# EAGLE board RatDBS-Compact2032Battery (EAGLE 7.3.0)
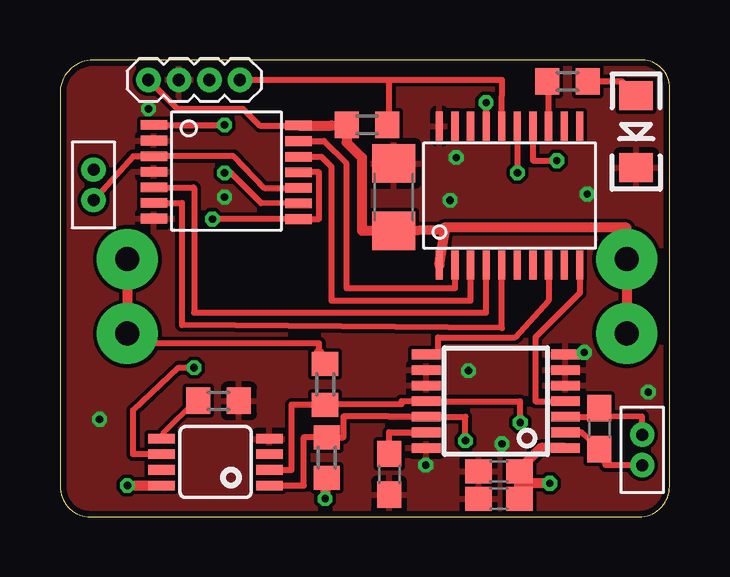
[diagram p0: board, top side]
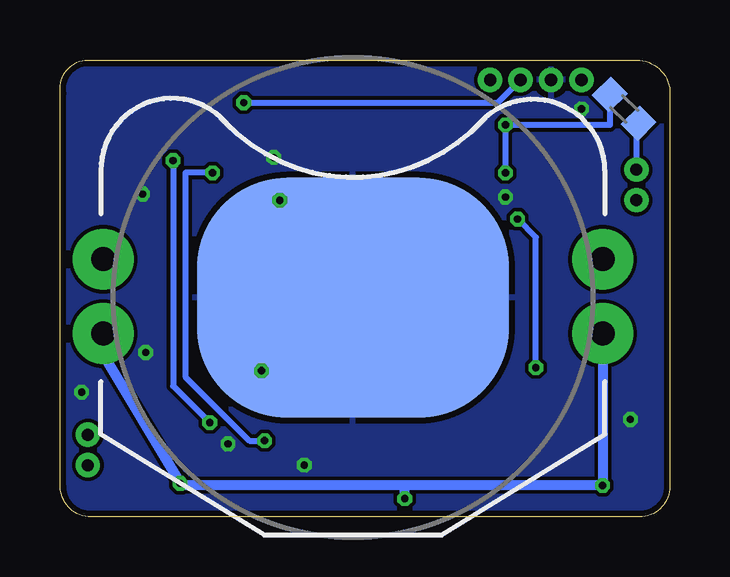
[diagram p1: board, bottom side, seen from below]

Size 25.41 x 19.06 mm. Coordinates in mm from the lower left corner, seen from the top.
Outline: 0,17.78 0,1.27 arc90 1.27,0 24.13,0 arc90 25.4,1.27 25.4,17.65 arc90 24.38,19.05 1.52,19.05 arc90 0,17.78
Copper layers (1*16): Top 0.035mm / dielectric 1.5mm / Bottom 0.035mm
Design rules "Seeed_DRU": minimum track width 6mil, minimum drill 12mil, track to track 6mil, track to pad 6mil, pad to pad 6mil, via to via 6mil, smd to smd 0mil, copper to edge 10mil, drill to drill 10mil, minimum pad ring 10mil, minimum via ring 6mil, stop-mask expansion 2mil, vias tented up to drill 100mil, thermal gap 10mil

## Footprints (pad centres in the part's own frame; a part is rotated, then mirrored left to right if it is on the bottom)
FTSH-102-DH = drill 0.5 pad 1: P$1 -0.635,0; P$2 0.635,0
BATTCON_20MM_PTH_COMPACT = drill 1 pad 2.54: 1 -10.4,1.6; 3 10.4,1.6; 4 10.4,-1.5; 5 -10.4,-1.5 | smd 13 x 10: 2 0,0
C0603 = smd 1.1 x 1: 1 -0.85,0; 2 0.85,0
C1206 = smd 1.6 x 1.8: 1 -1.4,0; 2 1.4,0
8_PIN = smd 1.1 x 0.4: 1 -2.25,0.975; 2 -2.25,0.325; 3 -2.25,-0.325; 4 -2.25,-0.975; 5 2.25,-0.975; 6 2.25,-0.325; 7 2.25,0.325; 8 2.25,0.975
1X04-1.27MM = drill 0.508 pad 1: 1 0,0; 2 1.27,0; 3 2.54,0; 4 3.81,0
LED-1206 = smd 1.2 x 1.4: A -1.5,0; C 1.5,0
20_PIN = smd 0.3 x 1.2: 1 -2.925,-2.9; 2 -2.275,-2.9; 3 -1.625,-2.9; 4 -0.975,-2.9; 5 -0.325,-2.9; 6 0.325,-2.9; 7 0.975,-2.9; 8 1.625,-2.9; 9 2.275,-2.9; 10 2.925,-2.9; 11 2.925,2.9; 12 2.275,2.9; 13 1.625,2.9; 14 0.975,2.9; 15 0.325,2.9; 16 -0.325,2.9; 17 -0.975,2.9; 18 -1.625,2.9; 19 -2.275,2.9; 20 -2.925,2.9
R0603 = smd 1 x 1.1: 1 -0.85,0; 2 0.85,0
14_PIN = smd 1.1 x 0.4: 1 -3.26,1.165; 2 -3.26,0.515; 3 -3.26,-0.135; 4 -3.26,-0.785; 5 -3.26,-1.435; 6 -3.26,-2.085; 7 -3.26,-2.735; 8 2.77,-2.755; 9 2.77,-2.105; 10 2.77,-1.455; 11 2.77,-0.805; 12 2.77,-0.155; 13 2.77,0.495; 14 2.77,1.145
PW_R-PDSO-G14 = smd 0.4 x 1.2: 1 -1.95,-2.9; 2 -1.3,-2.9; 3 -0.65,-2.9; 4 0,-2.9; 5 0.65,-2.9; 6 1.3,-2.9; 7 1.95,-2.9; 8 1.95,2.9; 9 1.3,2.9; 10 0.65,2.9; 11 0,2.9; 12 -0.65,2.9; 13 -1.3,2.9; 14 -1.95,2.9

## Placement (x,y rotation side)
ANT  FTSH-102  [FTSH-102-DH]  24.26,2.79 270 top
BAT1  20mm coincell  [BATTCON_20MM_PTH_COMPACT]  13.21,9.14 0 bottom
C1  1µ  [C0603]  18.29,1.91 180 top
C2  0.1µ  [C0603]  18.29,0.76 180 top
C_VC  0.47µ  [C0603]  13.72,1.78 270 top
CANT  [C0603]  22.48,3.68 270 top
CBAT  10µ  [C1206]  13.91,13.34 270 top
DS4432U+  [8_PIN]  6.48,2.29 180 top
JP1  [1X04-1.27MM]  3.68,18.22 0 top
LED6  GREEN  [LED-1206]  24,16.07 270 top
MSP430  MSP  [20_PIN]  18.73,13.4 0 top
R1_I2C  10k  [R0603]  11.11,2.48 270 top
R2_I2C  10k  [R0603]  11.05,5.52 90 top
R_INPUT_FS0  47k  [R0603]  6.6,4.84 180 top
R_LED  R_LED  [R0603]  21.15,18.16 0 top
R_LOAD_EX  10k  [R0603]  1.91,17.02 135 bottom
R_PULLUP_RST  43k  [R0603]  12.79,16.35 180 top
STIM  FTSH-102  [FTSH-102-DH]  1.4,13.84 90 top
TS3A4751_0  SW  [14_PIN]  7.18,15.18 0 top
U$1  RF  [PW_R-PDSO-G14]  18.16,4.83 90 top

## Library data of the parts
ANT STIM = Samtec50Mil
BAT1 = Battery
C1 C2 C_VC CANT CBAT = rcl
DS4432U+ MSP430 = RatDBS
JP1 = SparkFun
LED6 = SparkFun-LED
R1_I2C R2_I2C R_INPUT_FS0 R_LED R_LOAD_EX R_PULLUP_RST TS3A4751_0 = BiphasicBoard
U$1 = RF430CL330H

## Nets
_RST: JP1.4 MSP430.16 R_PULLUP_RST.1
GND: BAT1.2 C1.2 C2.2 C_VC.2 CBAT.1 DS4432U+.4 JP1.2 LED6.C MSP430.20 R_INPUT_FS0.1 TS3A4751_0.2 TS3A4751_0.4 TS3A4751_0.7 U$1.5 U$1.6 U$1.7 U$1.9 U$1.10 U$1.14
IN1: MSP430.2 TS3A4751_0.13
IN2: MSP430.4 TS3A4751_0.5
IN3: MSP430.5 TS3A4751_0.6
IN4: MSP430.3 TS3A4751_0.12
N$1: C_VC.1 U$1.13
N$2: ANT.P$2 CANT.2 U$1.2
N$3: MSP430.8 U$1.8
N$4: R_LOAD_EX.1 STIM.P$2
N$5: MSP430.13 R_LED.1
N$6: MSP430.7
N$7: MSP430.10 U$1.4
N$8: DS4432U+.5 R_INPUT_FS0.2
N$9: LED6.A R_LED.2
N$12: ANT.P$1 CANT.1 U$1.3
SCL: DS4432U+.2 MSP430.14 R2_I2C.1 U$1.11
SDA: DS4432U+.1 MSP430.15 R1_I2C.1 U$1.12
STIM_IN: DS4432U+.6 TS3A4751_0.8 TS3A4751_0.11
STIM_OUT1: R_LOAD_EX.2 TS3A4751_0.1 TS3A4751_0.9
STIM_OUT2: STIM.P$1 TS3A4751_0.3 TS3A4751_0.10
TEST: JP1.3 MSP430.17
VDD: BAT1.1 BAT1.3 BAT1.4 BAT1.5 C1.1 C2.1 CBAT.2 DS4432U+.8 JP1.1 MSP430.1 R1_I2C.2 R2_I2C.2 R_PULLUP_RST.2 TS3A4751_0.14 U$1.1

## Tracks (layer width: path | path; a pad name or v marks a point on that pad's centre or on a via)
_RST
  Top 0.254: MSP430.16 18.41,17.57 18.41,18.22 13.72,18.22 | 13.46,16.57 R_PULLUP_RST.1 13.72,16.42 13.72,18.22 | JP1.4 13.72,18.22
GND  (via drill 0.3)
  other vias: 16.51,14.99 21.97,13.46 21.84,6.86 3.68,17.02 17.02,6.1 18.41,3.05 15.24,2.16 1.65,4.06 24.51,5.21 16.26,13.21 6.86,13.34
  pour Bottom: 0,19.05 25.4,19.05 25.4,0 0,0
  pour Top: 0,19.05 25.4,19.05 25.4,0 0,0
IN1
  Top 0.254: MSP430.2 16.46,9.53 11.94,9.53 11.94,14.73 11,15.67 TS3A4751_0.13
IN2
  Top 0.254: TS3A4751_0.5 5.56,13.74 5.59,13.72 5.59,8.51 17.76,8.51 MSP430.4
IN3
  Top 0.254: TS3A4751_0.6 5.08,13.09 5.08,8 18.41,7.87 MSP430.5
IN4
  Top 0.254: TS3A4751_0.12 10.89,15.02 11.3,14.61 11.3,9.02 17.11,9.02 MSP430.3
N$1
  Top 0.254: C_VC.1 13.72,3.53 U$1.13
N$2
  Top 0.254: U$1.2 21.72,3.53 CANT.2 22.73,2.16 ANT.P$2
N$3
  Top 0.254: MSP430.8 20.36,9.02 18.96,7.49 15.75,7.49 15.75,6.78 U$1.8
N$4
  Bottom 0.254: R_LOAD_EX.1 1.4,16.42 STIM.P$2
N$5
  Top 0.254: MSP430.13 20.36,17.84 R_LED.1
N$7
  Top 0.254: U$1.4 19.81,4.83 19.81,7.49 21.66,9.34 MSP430.10
N$8
  Top 0.203: DS4432U+.5 4.27,3.45 5.69,4.88 R_INPUT_FS0.2
N$9
  Top 0.254: R_LED.2 23.41,18.16 LED6.A
N$12
  Top 0.254: U$1.3 22.73,4.18 | ANT.P$1 24.26,4.19 22.73,4.18 | 22.73,4.18 CANT.1
SCL  (via drill 0.3)
  Top 0.254: DS4432U+.2 9.65,1.96 9.65,4.67 R2_I2C.1 11.56,4.7 14.22,4.7 14.22,4.83 U$1.11 19.18,4.83 v19.18,3.94 | MSP430.14 19.71,14.86 v20.7,14.86
  Bottom 0.254: v20.7,14.86 20.7,5.46 v19.18,3.94
SDA  (via drill 0.3)
  Top 0.254: MSP430.15 v19.06,14.35 | v16.89,3.17 16.89,4.18 U$1.12 13.72,4.18 13.72,4.19 11.81,4.19 11.81,3.33 R1_I2C.1 10.16,3.33 10.16,1.31 DS4432U+.1
  Bottom 0.254: v19.06,14.35 20.19,14.35 20.19,5.84 17.53,3.17 v16.89,3.17
STIM_IN  (via drill 0.3)
  Top 0.254: DS4432U+.6 3.05,2.61 3.05,4.45 4.95,6.22 v5.59,6.22 | TS3A4751_0.11 10.79,14.37 10.79,12.42 TS3A4751_0.8 v6.35,12.42
  Bottom 0.254: v5.59,6.22 5.59,11.66 v6.35,12.42
STIM_OUT1  (via drill 0.3)
  Top 0.254: TS3A4751_0.9 8.38,13.08 7.11,14.35 v6.86,14.34 | TS3A4751_0.1 v6.86,16.34
  Bottom 0.254: v6.86,14.34 v6.86,16.34 2.51,16.34 R_LOAD_EX.2
STIM_OUT2
  Top 0.254: STIM.P$1 3.05,15.04 TS3A4751_0.3 7.24,15.04 8.51,13.72 TS3A4751_0.10
TEST  (via drill 0.3)
  Top 0.254: MSP430.17 v17.76,17.27
  Bottom 0.254: v17.76,17.27 7.18,17.27 JP1.3
VDD  (via drill 0.3)
  Top 0.254: 10.79,6.86 10.79,7.24 2.81,7.24 BAT1.4 | JP1.1 4.89,17.02 7.62,17.02 8.32,16.32 TS3A4751_0.14
  Top 0.406: TS3A4751_0.14 11.31,16.32 R_PULLUP_RST.2 11.94,15.62 12.57,14.99 12.57,11.94 CBAT.2 16,11.98 | R2_I2C.2 10.79,6.86 | MSP430.1 16,11.77 16,11.98 | BAT1.3 BAT1.4 | v2.81,1.31 DS4432U+.8 | 16,11.98 16,12.06 23.61,12.06 BAT1.1 BAT1.5 | U$1.1 20.02,2.88 19.14,1.99 C1.1 C2.1 19.14,1.4 v20.41,1.4 | R1_I2C.2 11.05,1.63 v11.05,0.76
  Bottom 0.406: BAT1.4 v2.81,1.31 11.05,1.31 | BAT1.5 23.61,6.76 v20.41,1.4 20.41,1.31 11.05,1.31 | v11.05,0.76 11.05,1.31

## Text on the board
tDocu: VGTR
bDocu: STIM | NFC-RDBS v1.2b / Kemere Lab (C)2015